# Altium PCB Diplomski.PcbDoc (part 2 of 2)
Units mm, origin at the board's own origin, x right, y up, seen from the top; angles counter-clockwise.
Board outline 40.1 x 36.5 mm, 4 copper layers (Top Layer, Layer 1, Layer 2, Bottom Layer), stack 1.592 mm thick; 128 components, 110 nets, 388 pads, 149 vias.
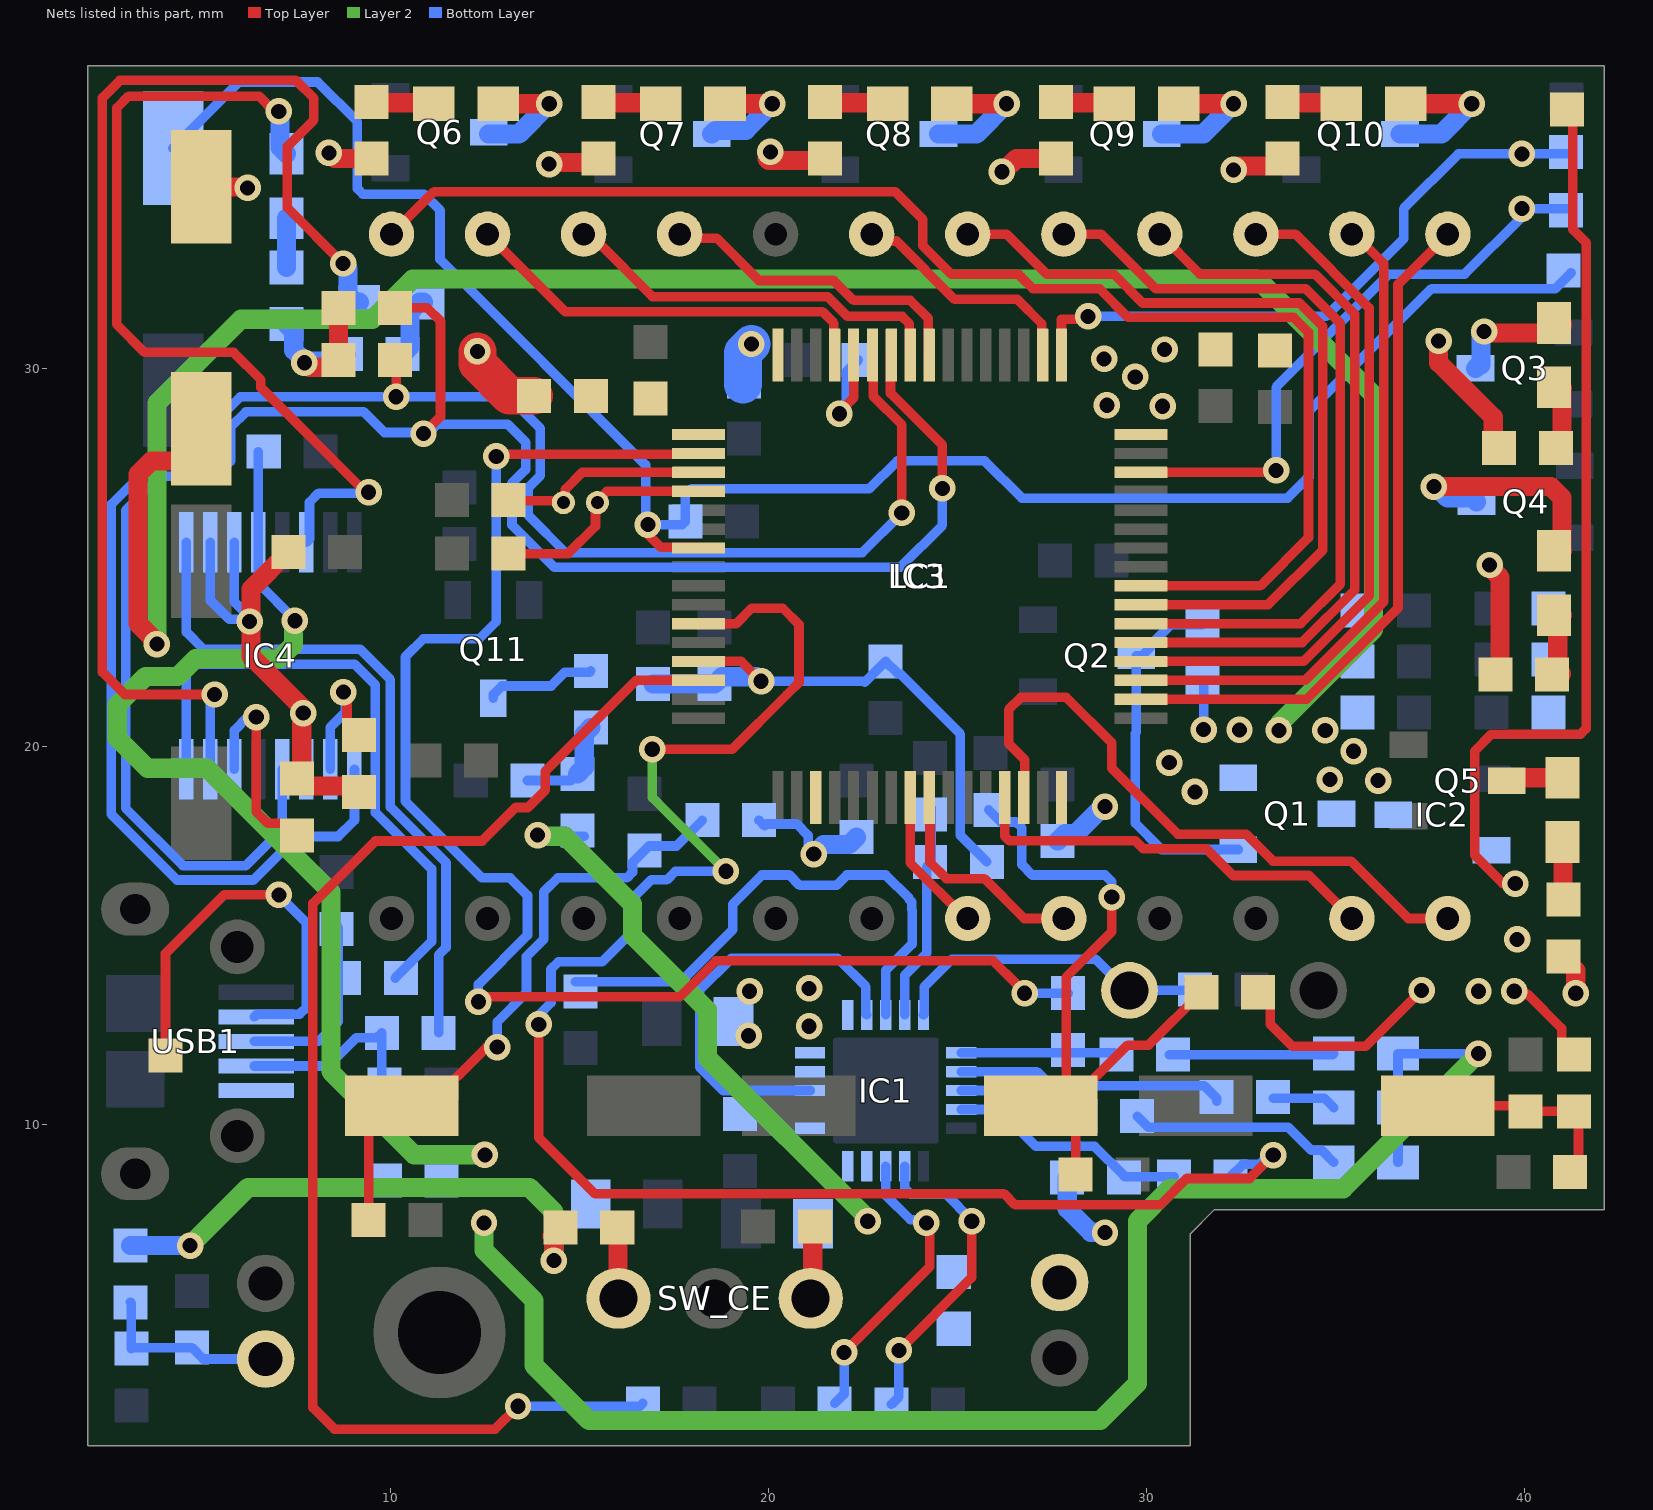
[diagram p4: the nets of this part, all layers, seen from the top]

## Via types
v1: diameter 0.7, hole 0.4, Top Layer to Bottom Layer, tented both sides, 145 vias
v2: diameter 0.7, hole 0.4, Top Layer to Bottom Layer, tented top, 4 vias

## Nets (pads, with @x,y where several pads share a name; then routed paths per layer and width w, separated by ;. In a path a pad name is that pad's centre, name@x,y a point inside that pad or via, vN(x,y) a via of type N, cw(c..) or ccw(c..) an arc to the next point about the centre after c; other vN are vias at no path point) (continued)
LCD_SEG8_B1: IC3.56 LC1.21 | length 8.5
  Top Layer w0.254: LC1.21@17.65,33.55 17.756,33.444 18.631,33.444 19.75,32.325 21.725,32.325 22.25,31.8 23.75,31.8 24.227,31.323 24.227,30.373 IC3.56@24.25,30.35
LCD_SEG9_A1: IC3.57 LC1.22 | length 10
  Top Layer w0.254: LC1.22@15.5,33.325 16.925,31.9 21.564,31.9 22.087,31.377 23.531,31.377 23.727,31.181 23.727,30.373 IC3.57@23.75,30.35
LCD_SEG10_D3: IC3.29 LC1.11 | length 11.1
  Top Layer w0.254: IC3.29@26.25,18.65 26.25,17.625 26.363,17.511 29.698,17.511 29.91,17.3 31.579,17.3 31.722,17.157 32.291,16.588 34.292,16.588 LC1.11@35.43,15.45
LCD_SEG11_C3: IC3.30 LC1.12 | length 17.1
  Top Layer w0.254: IC3.30@26.75,18.65 26.773,19.481 26.773,19.652 26.35,20.075 26.35,20.975 26.675,21.3 27.875,21.3 29.075,20.1 29.075,19.43 30.824,17.681 32.63,17.681 33.342,16.969 35.406,16.969 36.925,15.45 LC1.12@37.97,15.45
LCD_SEG13_B3: IC3.34 LC1.13 | length 18.2
  Top Layer w0.254: IC3.34@29.85,21.25 34.233,21.25 36.65,23.667 36.65,32.225 37.97,33.545 LC1.13@37.97,33.55
LCD_SEG14_A3: IC3.35 LC1.14 | length 17.4
  Top Layer w0.254: IC3.35@29.85,21.75 34.194,21.75 36.269,23.825 36.269,32.781 35.5,33.55 LC1.14@35.43,33.55
LCD_SEG15_F3: IC3.36 LC1.15 | length 18.2
  Top Layer w0.254: IC3.36@29.85,22.25 34.155,22.25 35.888,23.982 35.888,31.597 33.935,33.55 LC1.15@32.89,33.55
LCD_SEG16_F1: IC3.61 LC1.23 | length 11
  Top Layer w0.254: LC1.23@12.57,33.55 14.62,31.5 21.425,31.5 21.727,31.198 21.727,30.373 IC3.61@21.75,30.35
LCD_SEG17_F2: IC3.50 LC1.19 | length 6.3
  Top Layer w0.254: LC1.19@22.73,33.55 22.911,33.369 23.381,33.369 24.925,31.825 26.583,31.825 27.227,31.181 27.227,30.373 IC3.50@27.25,30.35
LCD_SEG22_D2: IC3.24 LC1.7 | length 3.9
  Top Layer w0.254: IC3.24@23.75,18.65 23.75,16.922 25.222,15.45 LC1.7@25.27,15.45
LCD_SEG23_C2: IC3.25 LC1.8 | length 5.9
  Top Layer w0.254: IC3.25@24.25,18.65 24.273,18.627 24.273,16.938 24.704,16.507 25.708,16.507 26.765,15.45 LC1.8@27.81,15.45
LCD_SEG24_G3: IC3.37 LC1.16 | length 19.6
  Top Layer w0.254: IC3.37@29.85,22.75 34.116,22.75 35.507,24.14 35.507,31.44 34.453,32.493 31.407,32.493 LC1.16@30.35,33.55
LCD_SEG25_B2: IC3.38 LC1.17 | length 20.9
  Top Layer w0.254: LC1.17@27.81,33.55 28.8,33.55 30.238,32.112 34.203,32.112 35.126,31.189 35.126,24.298 34.078,23.25 IC3.38@29.85,23.25
LCD_SEG26_A2: IC3.39 LC1.18 | length 21.7
  Top Layer w0.254: LC1.18@25.27,33.55 26.3,33.55 27.357,32.493 29.132,32.493 29.894,31.731 34.045,31.731 34.664,31.113 34.664,25.198 33.216,23.75 IC3.39@29.85,23.75
LCD_SEG27_G1: IC3.40 LC1.24 | length 37.1
  Top Layer w0.254: LC1.24@10.03,33.55 11.155,34.675 23.35,34.675 24.078,33.947 24.078,33.247 24.832,32.493 26.608,32.493 26.683,32.419 26.994,32.108 28.754,32.108 29.512,31.35 33.887,31.35 34.283,30.955 34.283,25.523 33.009,24.25 IC3.40@29.85,24.25
NetBAT1_1: BAT1.1 BAT_FUSE.1
NetC13_1: C13.1 IC3.3 OSC32k.1 | length 5.5
  Top Layer w0.254: C13.1@13.125,26.525 13.15,26.5 14.625,26.5 14.625,26.801 15.08,27.256 18.144,27.256 IC3.3@18.15,27.25
NetC14_1: C14.1 IC3.4 OSC32k.2 | length 6.1
  Top Layer w0.254: C14.1@13.125,25.1 14.7,25.1 15.425,25.825 15.425,26.5 15.472,26.5 15.722,26.75 IC3.4@18.15,26.75
NetC25_1: C25.1 R28.1 R29.2 REED.1 | length 4.9
  Bottom Layer w0.254: R28.1@3.125,5.3 3.15,5.275 R29.2@3.15,4.075 3.175,4.1 C25.1@4.75,4.1 5.05,3.8 REED.1@6.7,3.8
NetC26_1: C26.1 R30.1 R33.2 SW_LEFT.2 | length 17.4
  Top Layer w0.254: SW_LEFT.2@9.35,11.173 10.023,10.5 SW_LEFT.2@10.098,10.5 ; C26.1@9.425,7.475 9.425,9.827 SW_LEFT.2@10.098,10.5 ; v1(12.826,12.051) 12.551,12.051 11,10.5 SW_LEFT.2@10.3,10.5 SW_LEFT.2@10.098,10.5
  Bottom Layer w0.254: v1(12.826,12.051) 12.826,12.717 13.6,13.491 13.6,14.446 14.053,14.899 14.053,15.888 14.061,15.896 14.061,16.161 14.426,16.526 16.253,16.526 16.402,16.675 16.402,16.927 16.843,17.368 17.568,17.368 R30.1@18.25,18.05
NetC27_1: C27.1 R31.1 R34.2 SW_MID.2 | length 19.1
  Top Layer w0.254: SW_MID.2@27.2,10.5 SW_MID.2@27.452,10.5 ; C27.1@28.125,8.675 28.125,9.827 SW_MID.2@27.452,10.5 ; v1(29.08,16.018) 29.08,15.105 27.875,13.9 27.875,10.525 SW_MID.2@27.9,10.5 ; R31.1@31.135,13.815 R31.1@31.45,13.5 30.05,12.1 29.5,12.1 SW_MID.2@27.9,10.5 ; SW_MID.2@27.452,10.5 SW_MID.2@27.9,10.5
  Bottom Layer w0.254: R34.2@25.825,18.325 26.148,18.002 26.548,18.002 26.7,17.85 26.7,16.875 26.975,16.6 28.901,16.6 29.05,16.451 29.08,16.421 v1(29.08,16.018)
NetC28_1: C28.1 R32.1 R35.2 SW_RIGHT.2 | length 5.5
  Top Layer w0.254: SW_RIGHT.2@37.7,10.5 39.875,10.5 R35.2@40.025,10.35 41.375,10.35 41.425,10.3 C28.1@41.425,8.65
NetC_VLCD_1: C_VLCD.1 IC3.1 JP_VLCD.1
NetIC1_3: IC1.3 R_SEL.2 | length 14.3
  Bottom Layer w0.254: R_SEL.2@14.889,13.775 17.675,13.775 19.05,15.15 19.05,15.825 19.825,16.6 20.55,16.6 20.825,16.325 21.8,16.325 22.075,16.6 23.1,16.6 23.725,15.975 23.725,15.95 23.787,15.888 23.787,15.688 23.801,15.674 23.801,14.776 23.1,14.075 IC1.3@23.1,12.9
NetIC1_4: IC1.4 R_PROG2_LOW.2 R_PROG_HIGH.1 | length 5.8
  Bottom Layer w0.254: IC1.4@23.6,12.9 23.6,13.944 24.184,14.527 24.184,16.809 R_PROG_HIGH.1@24.3,16.925 ; R_PROG_HIGH.1@24.275,16.95 24.3,16.975 R_PROG2_LOW.2@24.3,18.375
NetIC1_5: IC1.5 NTC_BAT.2 R4.2 | length 8.6
  Bottom Layer w0.254: IC1.5@24.1,12.9 24.123,12.923 24.123,13.648 24.852,14.377 28.648,14.377 NTC_BAT.2@29.575,13.45 ; NTC_BAT.2@29.55,13.55 31.25,13.55 R4.2@31.275,13.575
NetIC1_12: IC1.12 R_PROG3.1 | length 8.5
  Top Layer w0.254: v1(23.45,4.025) 25.375,5.95 25.375,7.442 v1(25.377,7.444)
  Bottom Layer w0.254: R_PROG3.1@23.25,2.6 23.45,2.8 v1(23.45,4.025) ; IC1.12@23.6,8.9 23.6,8.322 23.749,8.173 24.677,8.173 25.375,7.475 25.375,7.446 v1(25.377,7.444)
NetIC1_13: IC1.13 R_PROG1.2 | length 8
  Top Layer w0.254: v1(22,3.975) 24.263,6.238 24.263,7.313 v1(24.177,7.398)
  Bottom Layer w0.254: R_PROG1.2@21.75,2.625 22,2.875 v1(22,3.975) ; IC1.13@23.1,8.9 23.1,8.134 23.751,7.483 24.092,7.483 v1(24.177,7.398)
NetIC3_60: IC3.60 R11.1 | length 3.3
  Top Layer w0.254: v1(21.875,28.8) 21.875,28.846 22.25,29.221 IC3.60@22.25,30.35
  Bottom Layer w0.254: v1(21.875,28.8) 21.875,28.921 22.052,29.098 22.052,29.902 R11.1@22.375,30.225
NetIC4_2: IC4.2 R20.1 | length 3.5
  Top Layer w0.254: v1(8.757,21.44) 8.757,21.319 8.852,21.224 8.852,20.623 R20.1@9.175,20.3
  Bottom Layer w0.254: IC4.2@8.413,19.4 8.413,20.512 8.81,20.91 8.81,21.387 v1(8.757,21.44)
NetIC4_6: IC4.6 R21.1 | length 5.6
  Top Layer w0.254: v1(6.45,20.776) 6.45,18.275 6.752,17.973 7.202,17.973 R21.1@7.525,17.65
  Bottom Layer w0.254: IC4.6@5.873,19.4 5.873,20.425 6.224,20.776 v1(6.45,20.776)
NetIC4_7: IC4.7 LED_TX.K | length 32.9
  Top Layer w0.254: v1(5.35,21.375) 2.975,21.375 2.381,21.969 2.381,37.156 2.844,37.619 7.501,37.619 7.975,37.145 7.975,36.575 7.275,35.875 7.275,34.25 v1(8.75,32.775)
  Bottom Layer w0.254: IC4.7@5.238,19.4 5.237,21.262 v1(5.35,21.375)
  Bottom Layer w0.508: v1(8.75,32.775) 8.879,32.646 8.879,31.946 9.075,31.75 LED_TX.K@9.175,31.75
NetIC4_8: IC4.8 R25.2 | length 16.6
  Bottom Layer w0.254: IC4.8@4.603,19.4 4.603,21.958 4.815,22.171 9.06,22.171 9.602,21.629 9.602,18.249 11.09,16.761 11.09,14.84 R25.2@10.125,13.875
NetIC4_9: IC4.9 R24.2 | length 18.3
  Bottom Layer w0.254: IC4.9@4.603,25.4 4.603,23.023 5.05,22.575 9.194,22.575 10,21.769 10,18.397 11.471,16.927 11.471,14.682 11.275,14.486 R24.2@11.275,12.425
NetIC4_14: IC4.14 LED_RX.K | length 22.9
  Top Layer w0.254: v1(7.046,36.8) 6.925,36.8 6.525,37.2 3.075,37.2 2.762,36.887 2.762,31.163 3.5,30.425 5.85,30.425 6.575,29.7 6.575,29.491 9.341,26.725 v1(9.425,26.725)
  Bottom Layer w0.254: IC4.14@7.778,25.4 7.86,25.483 7.86,26.461 8.1,26.7 v1@9.45,26.7
  Bottom Layer w0.508: v1(7.046,36.8) 7.083,36.763 7.083,35.842 LED_RX.K@7.25,35.675
NetLED_AVG_A: LED_AVG.A R13.1 | length 1.8
  Top Layer w0.508: R13.1@15.5,37.05 15.525,37.025 17.125,37.025 LED_AVG.A@17.15,37 LED_AVG.A@17.05,37
NetLED_AVG_K: LED_AVG.K Q7.3 | length 3.2
  Top Layer w0.508: LED_AVG.K@18.85,37 v1(20.1,37)
  Bottom Layer w0.508: Q7.3@18.5,36.2 18.596,36.296 19.396,36.296 v1(20.1,37)
NetLED_DST_A: LED_DST.A R14.1 | length 1.7
  Top Layer w0.508: R14.1@21.5,37.05 21.525,37.025 23.125,37.025 LED_DST.A@23.15,37
NetLED_DST_K: LED_DST.K Q8.3 | length 3.6
  Top Layer w0.508: LED_DST.K@24.85,37 v1(26.3,37)
  Bottom Layer w0.508: Q8.3@24.5,36.2 25.5,36.2 v1(26.3,37)
NetLED_HMM_A: LED_HMM.A R10.1 | length 1.5
  Top Layer w0.508: LED_HMM.A@41,17.475 41.012,17.462 41.012,15.963 R10.1@41.025,15.95
NetLED_HMM_K: LED_HMM.K Q5.3 | length 1.4
  Top Layer w0.508: Q5.3@39.571,19.175 LED_HMM.K@41,19.175
NetLED_KM_A: LED_KM.A R9.1 | length 1.6
  Top Layer w0.508: R9.1@40.875,21.925 LED_KM.A@40.875,23.45 ; R9.1@40.95,21.9 R9.1@40.975,21.925 ; LED_KM.A@40.975,23.45 LED_KM.A@41,23.475
NetLED_KM_K: LED_KM.K Q4.3 | length 6.2
  Top Layer w0.508: v1(37.6,26.875) 40.688,26.875 40.986,26.577 40.986,25.189 LED_KM.K@41,25.175
  Bottom Layer w0.508: v1(37.6,26.875) 37.652,26.875 37.956,26.571 38.629,26.571 Q4.3@38.725,26.475
NetLED_KMH_A: LED_KMH.A R8.1 | length 1.6
  Top Layer w0.508: R8.1@40.975,27.925 40.987,27.937 40.987,29.462 LED_KMH.A@41,29.475
NetLED_KMH_K: LED_KMH.K Q3.3 | length 3.3
  Top Layer w0.508: v1(38.927,30.977) 38.967,30.937 40.804,30.937 41,31.133 LED_KMH.K@41,31.175
  Bottom Layer w0.508: Q3.3@38.7,30 38.796,30.096 38.845,30.096 38.845,30.895 v1(38.927,30.977)
NetLED_nPG_K: LED_nPG.K R5.1 | length 4.4
  Bottom Layer w0.254: R5.1@30.6,11.85 34.925,11.85 LED_nPG.K@34.95,11.875
NetLED_ODO_A: LED_ODO.A R15.1 | length 1.6
  Top Layer w0.508: R15.1@27.6,37.05 27.625,37.025 29.125,37.025 LED_ODO.A@29.15,37
NetLED_ODO_K: LED_ODO.K Q9.3 | length 3.7
  Top Layer w0.508: LED_ODO.K@30.85,37 v1(32.3,37)
  Bottom Layer w0.508: Q9.3@30.4,36.2 31.5,36.2 v1(32.3,37)
NetLED_RX_A: LED_RX.A R26.1 | length 1.3
  Bottom Layer w0.508: R26.1@7.25,32.675 LED_RX.A@7.25,33.975
NetLED_SPD_A: LED_SPD.A R12.1 | length 1.7
  Top Layer w0.508: R12.1@9.5,37.05 9.525,37.025 11.125,37.025 LED_SPD.A@11.15,37
NetLED_SPD_K: LED_SPD.K Q6.3 | length 3.3
  Top Layer w0.508: LED_SPD.K@12.85,37 v1(14.2,37)
  Bottom Layer w0.508: Q6.3@12.6,36.2 13.4,36.2 v1(14.2,37)
NetLED_STAT1/LBO_K: LED_STAT1/LBO.K R7.1 | length 5.7
  Bottom Layer w0.254: R7.1@29.75,10.225 30.05,9.925 33.75,9.925 34.352,9.323 34.627,9.323 LED_STAT1/LBO.K@34.95,9
NetLED_STAT2_K: LED_STAT2.K R6.1 | length 1.7
  Bottom Layer w0.254: R6.1@33.35,10.7 34.7,10.7 LED_STAT2.K@34.95,10.45
NetLED_TIME_A: LED_TIME.A R16.1 | length 1.6
  Top Layer w0.508: R16.1@33.6,37.05 33.625,37.025 35.125,37.025 LED_TIME.A@35.15,37
NetLED_TIME_K: LED_TIME.K Q10.3 | length 4
  Top Layer w0.508: LED_TIME.K@36.85,37 v1(38.6,37)
  Bottom Layer w0.508: Q10.3@36.7,36.2 37.8,36.2 v1(38.6,37)
NetLED_TX_A: LED_TX.A R27.1 | length 1.7
  Bottom Layer w0.508: R27.1@10.325,30.375 10.521,30.571 10.521,31.496 10.775,31.75 LED_TX.A@10.875,31.75
NetQ1_1: Q1.1 Q2.3 R2.1 | length 9.6
  Bottom Layer w0.254: R2.1@31.475,23.225 30.644,23.225 30.098,22.679 30.098,22.623 29.875,22.4 Q2.3@29.725,22.4 29.725,20.375 29.7,20.35 29.7,17.975 30.4,17.275 Q1.1@32.425,17.275
NetQ11_3: Q11.3 R22.1 | length 2.9
  Bottom Layer w0.254: Q11.3@12.725,21.275 12.725,21.377 12.948,21.6 14.25,21.6 14.618,21.968 15.268,21.968 R22.1@15.3,22
NetR17_1: R17.1 R22.2 R36.2 | length 2.8
  Bottom Layer w0.254: R36.2@13.625,19.1 14.775,19.1 R17.1@14.95,19.275
  Bottom Layer w0.508: R17.1@14.95,19.275 15.125,19.45 15.125,20.325 R22.2@15.3,20.5
NetR_CD_2: R_CD.2 SW_CE.2 | length 1.9
  Top Layer w0.508: SW_CE.2@21.115,5.4 21.17,5.455 21.17,7.245 R_CD.2@21.225,7.3
NetR_CE_2: R_CE.2 SW_CE.1 | length 1.9
  Top Layer w0.508: R_CE.2@16,7.275 16.018,7.257 16.018,5.417 SW_CE.1@16.035,5.4
NetUSB1_1: USB1.1 USB_FUSE.1
nPG: IC1.6 JP_nPG.2 R5.2 | length 4.1
  Bottom Layer w0.254: IC1.6@25.1,11.9 26.85,11.9 27.925,11.9 29.15,11.9 R5.2@29.2,11.85
nRST: C15.1 IC3.7 RST.1 SW_RST.2 | length 52
  Top Layer w0.254: v1(16.81,25.868) 16.787,25.845 16.787,25.634 17.148,25.273 18.127,25.273 IC3.7@18.15,25.25
  Bottom Layer w0.254: SW_RST.2@4.25,35.825 6,37.575 8.075,37.575 9.125,36.525 9.125,34.756 9.274,34.607 10.893,34.607 11.312,34.188 11.312,32.888 16.75,27.45 16.75,25.927 v1(16.81,25.868) 17.718,25.868 C15.1@17.8,25.95 17.8,26.65 17.969,26.819 22.67,26.819 23.407,27.556 25.719,27.556 26.705,26.57 33.729,26.57 34.3,27.141 34.3,28.873 37.539,32.112 40.812,32.112 RST.1@41.225,32.525
nTE: IC1.9 JP_nTE.2 R_nTE.1 | length 6.4
  Bottom Layer w0.254: IC1.9@25.1,10.4 26.1,10.4 27.075,9.425 28.625,9.425 29.4,8.65 29.425,8.625 JP_nTE.2@30.725,8.625
STAT1: IC1.8 R7.2 | length 3.4
  Bottom Layer w0.254: IC1.8@25.1,10.9 26.85,10.9 27.525,10.225 R7.2@28.25,10.225
STAT2: IC1.7 R6.2 | length 7.1
  Bottom Layer w0.254: IC1.7@25.1,11.4 27.1,11.4 27.477,11.023 31.527,11.023 31.852,10.698 R6.2@31.852,10.623
SWCLK: IC3.49 SWCLK.1 | length 16.7
  Top Layer w0.254: IC3.49@27.75,30.35 27.75,31.302 28.376,31.302 v1(28.451,31.377)
  Bottom Layer w0.254: v1(28.451,31.377) 34.751,31.377 36.8,33.425 36.8,34.225 38.25,35.675 v1(39.925,35.675) 41.2,35.675 SWCLK.1@41.225,35.7
SWDIO: IC3.46 SWDIO.1 | length 15.6
  Top Layer w0.254: IC3.46@29.85,27.25 v1@33.427,27.25
  Bottom Layer w0.254: v1(33.427,27.301) 33.427,29.504 36.415,32.493 38.408,32.493 39.925,34.01 v1(39.925,34.225) SWDIO.1@41.175,34.225
UART_RX_FTDI: IC3.59 IC4.1 R18.1 | length 49.4
  Top Layer w0.254: R18.1@10.125,30.225 10.15,30.2 v1(10.15,29.25) ; IC3.59@22.75,30.35 22.773,30.327 22.773,29.661 22.773,29.519 22.775,29.517 22.775,29.261 23.526,28.51 v1(23.526,26.176)
  Bottom Layer w0.254: IC4.1@9.05,19.4 9.05,18.05 8.619,17.619 7.527,17.619 6.377,16.469 4.356,16.469 2.619,18.206 2.619,26.408 3.786,27.575 5.245,27.575 5.394,27.724 5.394,28.608 6.036,29.25 v1(10.15,29.25) 13.125,29.25 13.965,28.41 13.965,27.165 13.65,26.851 13.65,26.113 14.638,25.125 22.475,25.125 v1(23.526,26.176)
UART_TX_FTDI: IC3.58 IC4.4 R19.1 | length 51.6
  Top Layer w0.254: R19.1@10.125,31.6 10.975,31.6 11.325,31.25 11.325,28.725 v1(10.875,28.275) ; IC3.58@23.25,30.35 23.227,30.327 23.227,29.661 23.227,29.348 24.6,27.975 v1(24.6,26.825)
  Bottom Layer w0.254: IC4.4@7.143,19.4 7.143,17.817 6.175,16.85 4.514,16.85 3,18.364 3,26.25 3.9,27.15 5.375,27.15 5.775,27.55 5.775,28.45 6.175,28.85 9.3,28.85 9.844,28.306 10.844,28.306 v1(10.875,28.275) 10.996,28.275 11.246,28.525 13.1,28.525 13.576,28.049 13.576,27.326 13.217,26.967 13.217,25.858 14.331,24.744 23.494,24.744 24.6,25.85 v1(24.6,26.825)
uC_CE: IC3.14 JP_CE.2 | length 35.5
  Top Layer w0.254: v1(13.375,2.55) 12.769,1.944 8.522,1.944 7.95,2.516 7.95,15.85 9.6,17.5 12.425,17.5 13.312,18.387 13.637,18.387 14.1,18.85 14.1,19.35 16.5,21.75 IC3.14@18.15,21.75
  Bottom Layer w0.254: v1(13.375,2.55) 16.6,2.55 JP_CE.2@16.675,2.625
uC_nPG: IC3.2 JP_nPG.1 | length 40.1
  Top Layer w0.254: v1(12.325,13.25) 12.456,13.381 17.656,13.381 18.609,14.334 25.941,14.334 v1@26.575,13.7 ; v1(12.8,27.675) 12.852,27.727 18.127,27.727 IC3.2@18.15,27.75
  Bottom Layer w0.254: v1(12.325,13.25) 12.325,13.71 13.627,15.012 13.627,16.064 13.164,16.526 12.424,16.526 10.4,18.55 10.4,22.375 10.875,22.85 12.35,22.85 12.8,23.3 v1(12.8,27.675) ; v1(26.775,13.475) JP_nPG.1@27.925,13.475
uC_nTE: IC3.11 JP_nTE.1 | length 46.1
  Top Layer w0.254: v1(13.925,12.65) 13.925,9.65 15.4,8.175 26.225,8.175 26.525,7.875 30.361,7.875 31.061,8.575 32.725,8.575 33.242,9.092 33.248,9.092 v1(33.35,9.194) ; v1(16.926,19.926) 19.04,19.926 20.483,21.369 20.806,21.692 20.806,23.228 20.378,23.656 19.556,23.656 19.15,23.25 IC3.11@18.15,23.25
  Layer 2 w0.254: v1(16.926,19.926) 16.926,18.649 v1(18.875,16.7)
  Bottom Layer w0.254: v1(13.925,12.65) 13.925,12.9 14.248,13.223 14.248,14.11 14.44,14.302 15.602,14.302 16.275,14.975 16.275,15.85 16.898,16.473 17.31,16.473 17.537,16.7 v1(18.875,16.7) ; JP_nTE.1@32.225,8.625 32.548,8.948 32.983,8.948 33.229,9.194 v1(33.35,9.194)
USB_D+: C23.1 R25.1 USB1.3 | length 5.1
  Bottom Layer w0.254: USB1.3@6.4,12.2 8.1,12.2 8.625,12.725 8.625,13.875 C23.1@8.625,15.2 ; C23.1@8.55,15.325 8.575,15.3 C23.1@8.575,15.175
USB_D-: C22.1 R24.1 USB1.2 | length 5.1
  Bottom Layer w0.254: USB1.2@6.4,11.55 8.35,11.55 9.1,12.3 9.65,12.3 R24.1@9.775,12.425 9.775,11.126 C22.1@9.846,11.054
USB_ID: USB1.4 USB_ID.1 | length 11.1
  Top Layer w0.254: USB_ID.1@4.05,11.825 4.05,14.525 5.6,16.075 v1(7.05,16.075)
  Bottom Layer w0.254: USB1.4@6.4,12.85 6.473,12.923 7.599,12.923 7.777,13.101 7.777,15.327 7.05,16.054 v1(7.05,16.075)
VCCIO: C24.1 IC4.3 IC4.10 IC4.11 R18.2 R19.2 R20.2 R21.2 R26.2 R27.2 | length 20.1
  Top Layer w0.508: C24.1@7.3,25.15 6.312,24.162 6.312,23.343 v1(6.275,23.306) 6.312,23.269 6.312,22.388 7.756,20.944 v1(7.694,20.883) 7.658,20.846 7.658,19.283 R21.2@7.525,19.15 7.721,18.954 9.021,18.954 R20.2@9.175,18.8 ; v1(7.725,30.15) 7.846,30.029 8.429,30.029 R18.2@8.625,30.225 R19.2@8.625,31.6
  Bottom Layer w0.254: IC4.10@5.238,25.4 5.238,23.862 5.74,23.36 6.221,23.36 v1(6.275,23.306) ; IC4.11@5.873,25.4 5.873,23.828 v1@6.23,23.47 ; v1(7.694,20.883) 7.736,20.841 7.736,19.442 IC4.3@7.778,19.4
  Bottom Layer w0.508: R26.2@7.25,31.175 7.446,30.979 7.446,30.481 7.725,30.202 v1(7.725,30.15) 7.762,30.187 8.637,30.187 R27.2@8.825,30.375
VDD_3V0: C7.1 C8.1 C9.1 C10.1 C11.1 C12.1 C16.1 C17.1 C18.1 C19.2 IC2.2 IC3.13 IC3.19 IC3.32 IC3.48 IC3.64 JP_VLCD.2 R1.2 R28.2 R30.2 R31.2 R32.2 R_CE.1 R_nTE.2 R_PROG_HIGH.2 VDD_3V0.1 | length 71.8
  Top Layer w0.254: IC3.13@18.15,22.25 19.28,22.25 v1(19.805,21.725) ; R31.2@32.95,13.5 33.273,13.177 33.273,12.652 33.85,12.075 35.8,12.075 v1(37.275,13.55) ; v1@39.425,16.375 38.675,17.125 38.675,19.875 39.125,20.325 41.476,20.325 41.625,20.474 41.625,33.325 41.275,33.675 VDD_3V0.1@41.275,37 ; v1(39.725,13.525) 39.81,13.44 40.085,13.44 40.977,12.548 40.977,12.173 R32.2@41.3,11.85
  Top Layer w0.508: v1(14.325,6.4) 14.325,7 14.275,7.05 R_CE.1@14.5,7.275
  Top Layer w1: v1(12.3,30.45) 12.3,30.125 13.15,29.275 JP_VLCD.2@13.8,29.275
  Layer 2 w0.508: v1(4.7,6.8) 6.233,8.333 13.68,8.333 14.325,7.688 v1(14.325,6.4)
  Bottom Layer w0.254: R30.2@19.75,18.05 19.9,17.9 19.95,17.95 20.75,17.95 21.05,17.65 21.05,17.1 21.156,17.156 v1(21.199,17.156) ; v1(19.805,21.725) 22.527,21.725 22.551,21.701 R1.2@23.1,22.25 23.423,21.927 23.473,21.927 25.075,20.325 25.075,17.65 R_PROG_HIGH.2@25.775,16.95
  Bottom Layer w0.508: R28.2@3.125,6.8 v1(4.7,6.8) ; C17.1@16.95,21.65 C16.1@18.575,21.65 18.771,21.846 19.684,21.846 v1(19.805,21.725) ; v1(21.199,17.156) 21.203,17.151 21.456,17.404 22.129,17.404 C19.2@22.325,17.6 ; C18.1@27.65,17.5 27.846,17.696 28.132,17.696 28.848,18.412 v1(28.9,18.412) ; R_nTE.2@27.9,8.6 27.9,7.775 28.525,7.15 28.894,7.15 v1(28.9,7.144)
  Bottom Layer w1: C11.1@19.325,29.575 19.325,30.421 v1(19.55,30.646)
  other v1: 38.779,13.525 39.8,14.9 39.75,16.375 30.425,29 28.95,29.025 29.7,29.775 28.875,30.25 30.475,30.5
VDD_BAT: BAT_FUSE.2 C3.1 IC1.14 IC1.15 IC1.16 R17.2 | length 15.5
  Layer 2 w0.508: v1(13.894,17.656) 13.925,17.625 14.609,17.625 16.4,15.834 16.4,15.012 18.387,13.025 18.387,11.762 22.625,7.525 v1(22.625,7.444)
  Bottom Layer w0.254: v1(13.894,17.656) 13.925,17.625 R17.2@15.123,17.625
VDD_SEL: C2.1 IC1.1 IC1.20 Q1.2 R2.2 SW_ON2.1 | length 59.4
  Top Layer w0.508: v1(3.825,22.708) 3.825,22.752 3.325,23.252 3.325,27.2 3.675,27.55 4.454,27.55 5,28.096 SW_ON2.1@5,28.4
  Layer 2 w0.508: v1(3.825,22.708) 3.825,29.076 6.049,31.3 9.525,31.3 10.591,32.366 32.934,32.366 36,29.3 36,23.095 33.5,20.595 v1(33.5,20.425)
  Bottom Layer w0.254: R2.2@31.475,21.725 31.525,21.675 31.509,21.659 v1(31.509,20.445)
  other v1: 19.475,12.35 21.075,12.6 19.5,13.525 21.075,13.603 31.28,18.798 30.6,19.575 32.458,20.44
VDD_SWITCHED: C4.1 C5.1 C6.1 IC2.3 Q1.3 R8.2 R9.2 R10.2 R12.2 R13.2 R14.2 R15.2 R16.2 SW_ON2.2 | length 16.3
  Top Layer w0.508: SW_ON2.2@5,34.8 6.2,34.8 v1(6.225,34.775) ; v1(8.375,35.7) 8.525,35.55 R12.2@9.5,35.55 ; v1(14.197,35.406) 14.234,35.443 15.393,35.443 R13.2@15.5,35.55 ; v1(20.051,35.727) 20.051,35.624 19.964,35.538 20.001,35.501 21.451,35.501 R14.2@21.5,35.55 ; v1(26.175,35.2) 26.211,35.2 26.561,35.55 R15.2@27.6,35.55 ; v1(32.3,35.25) 32.352,35.25 32.456,35.354 33.404,35.354 R16.2@33.6,35.55 ; v1(37.725,30.725) 37.725,30.15 39.169,28.706 39.169,28.096 39.34,27.925 R8.2@39.475,27.925 ; v1(39.075,24.8) 39.075,24.748 39.35,24.473 R9.2@39.35,21.9 ; R10.2@41.025,14.45 41,14.425 41.35,14.075 v1(41.35,13.475)
  other v1: 36.125,19.1 34.85,19.125 35.475,19.875 34.725,20.425
VDD_USB: C1.1 C20.1 C21.1 IC1.2 IC1.18 IC1.19 IC4.12 LED_nPG.A LED_STAT1/LBO.A LED_STAT2.A USB_FUSE.2 | length 81.2
  Layer 2 w0.508: v1(7.475,23.325) 7.438,23.288 7.438,22.688 7.075,22.325 4.85,22.325 4.375,21.85 3.525,21.85 2.775,21.1 2.775,20.225 3.575,19.425 5.15,19.425 8.425,16.15 8.425,11.4 10.625,9.2 v1(12.5,9.2) ; v1(12.475,7.4) 12.475,6.675 13.8,5.35 13.8,3.625 15.25,2.175 28.775,2.175 29.758,3.158 29.758,7.451 30.607,8.3 35.2,8.3 v1(38.775,11.875)
  Bottom Layer w0.254: C21.1@6.508,27.8 IC4.12@6.508,25.4 6.508,24.317 v1@7.45,23.375 ; IC1.18@21.1,10.9 18.8,10.9 18.18,11.52 18.18,13.555 19.018,14.393 20.19,14.393 21.832,14.393 22.577,13.648 22.577,12.923 IC1.2@22.6,12.9 ; LED_STAT1/LBO.A@36.65,9 LED_nPG.A@36.65,11.875 v1(38.775,11.875)
pads on no net: IC3.5 IC3.6 IC4.15 IC4.16

## Polygon pours and split planes (outlines as drawn)
GND on Bottom Layer "BOT_GND" (solid, pour order 36): 30,1.775 30.425,2.2 30.425,7.85 30.725,8.15 41.525,8.15 41.85,8.525 41.85,36.575 40.65,37.775 3.525,37.775 2.3,36.55 2.3,2.625 3.15,1.775
GND on Bottom Layer "GND_L04_P016" (solid, pour order 16): 6.95,24.625 7.35,24.625 7.35,26.325 8.225,27.2 9.45,27.2 9.8,27.55 9.8,28.025 9.425,28.4 7.6,28.4 7.325,28.125 7.325,27.175 6.95,26.8
VDD_USB on Bottom Layer "VDD_USB_L04_P006" (solid, pour order 6): 16.387,7.762 16.387,8.787 16.595,8.995 17.62,8.995 18.175,9.55 19.35,9.55 20.55,10.75 21.5,10.75 21.525,10.775 21.525,11.525 21.45,11.6 14.55,11.6 13.2,10.25 11.775,10.25 10.825,9.3 10.825,7.775 11.525,7.075 15.7,7.075
NetBAT1_1 on Bottom Layer "NETBAT1_1_L04_P009" (solid, pour order 9): 25.625,5.15 26.1,5.625 26.1,6.075 27.025,7 28.325,7 28.775,6.55 28.775,5.3 28.25,4.775 27,4.775 26.125,3.9 24.425,3.9 24.25,4.075 24.25,4.95 24.45,5.15
VDD_SEL on Bottom Layer "VDD_SEL_L04_P010" (solid, pour order 10): 20.475,11.675 18.825,11.675 18.45,12.05 18.45,13.525 19.4,14.475 21.375,14.475 22.3,13.55 22.3,12.5 22.275,12.475 21.75,12.475 21.55,12.275 21.55,11.8 21.425,11.675
NetUSB1_1 on Bottom Layer "NETUSB1_1_L04_P005" (solid, pour order 5): 5.7,11.075 8.1,11.075 9.075,10.1 9.5,10.1 10.325,9.275 10.325,7.5 9.775,6.95 8.425,6.95 6.95,8.425 6.95,10.1 6.375,10.675 5.7,10.675
GND on Bottom Layer "GND_L04_P013" (solid, pour order 13): 24.475,13.35 25.275,14.15 26.05,14.15 26.2,14 26.2,12.4 25.975,12.175 24.675,12.175 24.375,11.875 24.125,12.125 24.475,12.475
VDD_3V0 on Bottom Layer "VDD_3V0_L04_P026" (solid, pour order 26): 40.025,24.143 40.332,24.45 41.8,24.45 42,24.25 42,14.875 41.275,14.15 40.775,14.15 40.4,13.775 40.4,13.15 40.025,12.775 37.15,12.775 36.825,13.1 36.825,14.1 37.1,14.375 38.15,14.375 38.7,14.925 38.7,15.85 37.95,16.6 37.95,17.8 38.275,18.125 39.65,18.125 40.025,18.5
GND on Bottom Layer "GND_L04_P025" (solid, pour order 25): 36.7,24.45 39.475,24.45 39.825,24.1 39.748,18.894 39.279,18.425 38.175,18.425 36.475,20.125 36.475,24.225
VDD_SWITCHED on Bottom Layer "VDD_SWITCHED_L04_P024" (solid, pour order 24): 34.725,16.725 37.15,16.725 37.575,17.15 37.575,18.7 36.25,20.025 36.25,24.325 36,24.575 34.725,24.575 34.15,24 34.15,18.85 34.25,18.75 34.25,17.2
no net on Bottom Layer "NONET_L04_P023" (solid, pour order 23): 34.45,17.5
VDD_SEL on Bottom Layer "VDD_SEL_L04_P022" (solid, pour order 22): 31.125,21.025 29.7,19.6 29.7,18.75 30.15,18.3 33.1,18.3 33.825,19.025 33.825,20.625 33.425,21.025
GND on Bottom Layer "GND_L04_P011" (solid, pour order 11): 24.4,10.1 25.6,10.1 26.075,9.625 26.075,8.675 25.75,8.35 24.05,8.35 23.925,8.475 23.925,9.625
VDD_BAT on Bottom Layer "VDD_BAT_L04_P008" (solid, pour order 8): 20.675,10.075 21.5,10.075 21.55,10.025 21.55,9.35 21.6,9.3 22.75,9.3 22.775,9.275 22.775,7.975 23.875,6.875 25.475,6.875 25.725,6.625 25.725,5.65 25.475,5.4 22.575,5.4 21.525,6.45 20.575,6.45 20.425,6.6 20.425,9.825
no net on Bottom Layer "NONET_L04_P003" (solid, pour order 3): 21.825,9.25
no net on Bottom Layer "NONET_L04_P002" (solid, pour order 2): 22.025,9.4
GND on Top Layer "TOP_GND" (solid, pour order 35): 30,1.775 30.425,2.2 30.425,7.85 30.725,8.15 41.525,8.15 41.85,8.525 41.85,36.575 40.65,37.775 3.525,37.775 2.3,36.55 2.3,2.625 3.15,1.775
VDD_3V0 on Top Layer "VDD_3V0_L01_P017" (solid, pour order 17): 33.775,31.175 34.05,30.9 34.05,29.9 33.9,29.75 31.241,29.75 31,29.509 31,28.575 30.553,28.128 29.1,28.128 28.375,28.854 28.375,30.7 28.85,31.175
GND on Top Layer "GND_L01_P037" (solid, pour order 37): 34.125,29.45 34.225,29.35 34.225,28.392 34.104,28.271 33.446,28.271 32.75,27.575 31.625,27.575 31.375,27.825 31.375,29.45
VDD_3V0 on Top Layer "VDD_3V0_L01_P018" (solid, pour order 18): 29.15,18.925 29.325,18.75 29.325,17.975 29.225,17.875 27.725,17.875 27.599,18.001 27.599,19.284 27.625,19.3 27.975,19.3 28.35,18.925
VDD_3V0 on Top Layer "VDD_3V0_L01_P029" (solid, pour order 29): 21.4,19.325 21.4,17.8 21.65,17.55 21.65,16.925 21.375,16.65 20.6,16.65 20.525,16.725 20.525,17.425 20.775,17.675 21.025,17.675 21.125,17.775 21.125,19.325
NetC_VLCD_1 on Top Layer "NETC_VLCD_1_L01_P021" (solid, pour order 21): 18.85,28.375 17.4,29.825 14.825,29.825 14.775,29.775 14.775,28.85 15.525,28.1 18.85,28.1
VDD_3V0 on Top Layer "VDD_3V0_L01_P014" (solid, pour order 14): 20.4,31.05 20.4,29.625 20.325,29.55 19.275,29.55 19,29.825 19,30.975 19.207,31.182 20.269,31.182 20.269,31.181
VDD_3V0 on Layer 2 "VDD_3V0_L03_P033" (solid, pour order 33): 9.225,11.65 11.198,9.677 13.05,7.825 13.05,5 15.475,2.575 28.375,2.575 29.125,3.325 29.125,8 30.025,8.9 36.4,8.9 38.15,10.65 38.15,12.15 38.35,12.35 39.875,12.35 40.45,12.925 40.45,16.225 39.675,17 39.075,17 38.05,15.975 35.7,15.975 31.2,11.475 27.625,11.475 23,6.85 22.55,6.85 18.125,11.275 18.125,15.4 19.4,16.675 21.525,16.675 22.625,17.775 28.925,17.775 29.3,18.15 29.3,20.675 31.6,22.975 31.6,31.5 31.375,31.725 12.125,31.725 11.075,30.675 11.075,20.5 9.225,18.65
VDD_SEL on Layer 2 "VDD_SEL_L03_P032" (solid, pour order 32): 33.65,16.825 34.45,16.025 34.45,15.05 33.65,14.275 31.125,11.75 27.15,11.75 23.7,8.3 22.675,8.3 18.525,12.45 18.525,15.2 19.825,16.5 21.775,16.5 22.775,17.5 28.962,17.537 29.45,18.025 29.45,19.95 30.8,21.3 33.9,21.3 34.3,20.9 34.3,20.45 33.65,19.8
VDD_SWITCHED on Layer 2 "VDD_SWITCHED_L03_P031" (solid, pour order 31): 7.775,37.525 5.475,35.225 5.475,34.3 6.1,33.675 8.8,33.675 9.45,34.35 33.125,34.35 38.65,28.825 38.65,19.125 38.4,18.875 37.75,18.875 35.95,20.675 35.025,20.675 33.9,19.55 33.9,17.3 34.825,16.375 38.175,16.375 39.05,17.25 39.775,17.25 40.625,16.4 40.625,13.225 41.05,12.8 41.6,12.8 41.925,13.125 41.925,31.325 35.725,37.525
VCCIO on Layer 2 "VCCIO_L03_P030" (solid, pour order 30): 8.05,23.8 7.825,24.025 7.275,24.025 6.925,23.675 6.925,23.025 6.7,22.8 5.925,22.8 5.675,23.05 5.675,29.125 7.325,30.775 8.025,30.775 8.725,30.075 8.725,26.375 9.65,25.45 10.7,24.4 10.7,20.4 9.6,19.3 7.65,19.3 6.875,20.075 6.875,21.45 8.05,22.625
GND on Layer 1 "GND_L02_P007" (solid, pour order 7): 30,1.775 30.425,2.2 30.425,7.85 30.725,8.15 41.525,8.15 41.85,8.525 41.85,36.575 40.65,37.775 3.525,37.775 2.3,36.55 2.3,2.625 3.15,1.775

## Keep-outs
Keep-Out Layer:
  the board outline again, w0.15

## Silkscreen, mask and mechanical layers (free items; w line width, h text height)
Top Overlay:
  lines w0.127: 39.3,13.125 39.3,11.241 39.441,11.1 ; 40.3,17.075 40.3,18.209 40.416,18.325
  text "+" at 24.604,6.075 h1.52
  text "-" at 24.554,2.192 h1.52
Bottom Overlay:
  lines w0.127: 3.709,6.05 4.309,6.65 5.35,6.65 ; 3.734,3.325 4.109,2.95 5.3,2.95 ; 5.334,4.85 5.625,5.141 5.625,6.35 5.95,6.675 6.025,6.75 7.25,6.75 ; 17.475,20.05 22.591,20.05 23.691,18.95 ; 18.075,16.15 24.809,16.15 25.025,16.366 ; 24.23,13.72 26.345,13.72 27.341,12.725 ; 30.675,5.075 30.675,7.9 30.816,8.041 31.475,8.041 ; 35.8,8.416 36.091,8.125 39.825,8.125 39.925,8.225 39.925,14.525 ; 35.8,9.866 35.916,9.75 36.575,9.75 38.55,9.75 38.625,9.825 38.625,14.575 ; 35.8,12.459 36.216,12.875 37.35,12.875 37.35,14.575 ; 39.175,34.375 39.175,36.125 39.324,36.274 40.657,36.274 ; 40.275,35.725 40.275,33.75 40.422,33.603 40.657,33.603
Mechanical 2:
  lines w0.15: 1.925,1.425 31.2,1.425 31.225,1.45 31.225,7.075 31.3,7.15 31.825,7.675 42.175,7.675 42.175,38.075 1.925,38.075 1.925,1.425